# EAGLE board Temperature_sensor_Board2_Tiled (EAGLE 7.7.0)
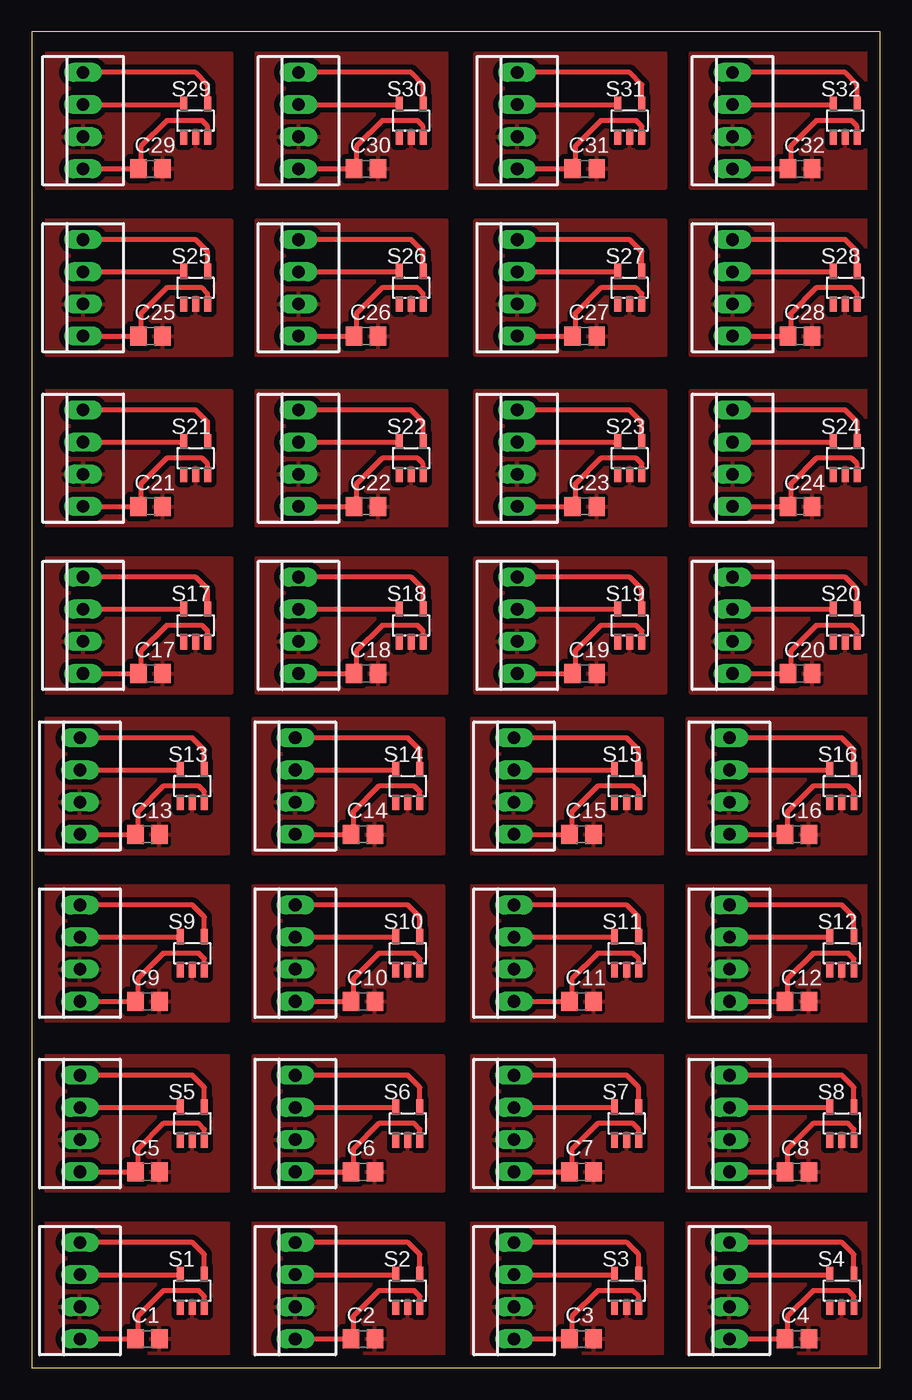
[diagram p0: board, top side]

Size 67.04 x 105.59 mm. Coordinates in mm from the lower left corner, seen from the top.
Outline: 0,0 67.04,0 67.04,105.59 0,105.59 0,0
Copper layers (1*16): Top 0.035mm / dielectric 1.5mm / Bottom 0.035mm
Design rules "default *": minimum track width 10mil, minimum drill 24mil, track to track 16mil, track to pad 14mil, pad to pad 14mil, via to via 14mil, smd to smd 14mil, copper to edge 40mil, drill to drill 8mil, minimum pad ring 10mil, minimum via ring 8mil, stop-mask expansion 4mil, vias tented up to drill 0mil, thermal gap 10mil

## Footprints (pad centres in the part's own frame; a part is rotated, then mirrored left to right if it is on the bottom)
C0805 = smd 1.3 x 1.5: 1 -0.95,0; 2 0.95,0
SOT23-5L = smd 0.55 x 1.2: 1 -0.95,-1.3; 2 0,-1.3; 3 0.95,-1.3; 4 0.95,1.3; 5 -0.95,1.3
22-23-2041 = drill 1 long: 1 -3.81,0; 2 -1.27,0; 3 1.27,0; 4 3.81,0

## Placement (x,y rotation side)
C1  0.01uF  [C0805]  9.14,2.29 0 top
C2  0.01uF  [C0805]  26.16,2.29 0 top
C3  0.01uF  [C0805]  43.43,2.29 0 top
C4  0.01uF  [C0805]  60.45,2.29 0 top
C5  0.01uF  [C0805]  9.14,15.49 0 top
C6  0.01uF  [C0805]  26.16,15.49 0 top
C7  0.01uF  [C0805]  43.43,15.49 0 top
C8  0.01uF  [C0805]  60.45,15.49 0 top
C9  0.01uF  [C0805]  9.14,28.96 0 top
C10  0.01uF  [C0805]  26.16,28.96 0 top
C11  0.01uF  [C0805]  43.43,28.96 0 top
C12  0.01uF  [C0805]  60.45,28.96 0 top
C13  0.01uF  [C0805]  9.14,42.16 0 top
C14  0.01uF  [C0805]  26.16,42.16 0 top
C15  0.01uF  [C0805]  43.43,42.16 0 top
C16  0.01uF  [C0805]  60.45,42.16 0 top
C17  0.01uF  [C0805]  9.4,54.86 0 top
C18  0.01uF  [C0805]  26.42,54.86 0 top
C19  0.01uF  [C0805]  43.69,54.86 0 top
C20  0.01uF  [C0805]  60.71,54.86 0 top
C21  0.01uF  [C0805]  9.4,68.07 0 top
C22  0.01uF  [C0805]  26.42,68.07 0 top
C23  0.01uF  [C0805]  43.69,68.07 0 top
C24  0.01uF  [C0805]  60.71,68.07 0 top
C25  0.01uF  [C0805]  9.4,81.53 0 top
C26  0.01uF  [C0805]  26.42,81.53 0 top
C27  0.01uF  [C0805]  43.69,81.53 0 top
C28  0.01uF  [C0805]  60.71,81.53 0 top
C29  0.01uF  [C0805]  9.4,94.74 0 top
C30  0.01uF  [C0805]  26.42,94.74 0 top
C31  0.01uF  [C0805]  43.69,94.74 0 top
C32  0.01uF  [C0805]  60.71,94.74 0 top
S1  TC74  [SOT23-5L]  12.7,6.1 0 top
S2  TC74  [SOT23-5L]  29.72,6.1 0 top
S3  TC74  [SOT23-5L]  46.99,6.1 0 top
S4  TC74  [SOT23-5L]  64.01,6.1 0 top
S5  TC74  [SOT23-5L]  12.7,19.3 0 top
S6  TC74  [SOT23-5L]  29.72,19.3 0 top
S7  TC74  [SOT23-5L]  46.99,19.3 0 top
S8  TC74  [SOT23-5L]  64.01,19.3 0 top
S9  TC74  [SOT23-5L]  12.7,32.77 0 top
S10  TC74  [SOT23-5L]  29.72,32.77 0 top
S11  TC74  [SOT23-5L]  46.99,32.77 0 top
S12  TC74  [SOT23-5L]  64.01,32.77 0 top
S13  TC74  [SOT23-5L]  12.7,45.97 0 top
S14  TC74  [SOT23-5L]  29.72,45.97 0 top
S15  TC74  [SOT23-5L]  46.99,45.97 0 top
S16  TC74  [SOT23-5L]  64.01,45.97 0 top
S17  TC74  [SOT23-5L]  12.95,58.67 0 top
S18  TC74  [SOT23-5L]  29.97,58.67 0 top
S19  TC74  [SOT23-5L]  47.24,58.67 0 top
S20  TC74  [SOT23-5L]  64.26,58.67 0 top
S21  TC74  [SOT23-5L]  12.95,71.88 0 top
S22  TC74  [SOT23-5L]  29.97,71.88 0 top
S23  TC74  [SOT23-5L]  47.24,71.88 0 top
S24  TC74  [SOT23-5L]  64.26,71.88 0 top
S25  TC74  [SOT23-5L]  12.95,85.34 0 top
S26  TC74  [SOT23-5L]  29.97,85.34 0 top
S27  TC74  [SOT23-5L]  47.24,85.34 0 top
S28  TC74  [SOT23-5L]  64.26,85.34 0 top
S29  TC74  [SOT23-5L]  12.95,98.55 0 top
S30  TC74  [SOT23-5L]  29.97,98.55 0 top
S31  TC74  [SOT23-5L]  47.24,98.55 0 top
S32  TC74  [SOT23-5L]  64.26,98.55 0 top
X1  22-23-2041  [22-23-2041]  3.81,6.1 90 top
X2  22-23-2041  [22-23-2041]  20.83,6.1 90 top
X3  22-23-2041  [22-23-2041]  38.1,6.1 90 top
X4  22-23-2041  [22-23-2041]  55.12,6.1 90 top
X5  22-23-2041  [22-23-2041]  3.81,19.3 90 top
X6  22-23-2041  [22-23-2041]  20.83,19.3 90 top
X7  22-23-2041  [22-23-2041]  38.1,19.3 90 top
X8  22-23-2041  [22-23-2041]  55.12,19.3 90 top
X9  22-23-2041  [22-23-2041]  3.81,32.77 90 top
X10  22-23-2041  [22-23-2041]  20.83,32.77 90 top
X11  22-23-2041  [22-23-2041]  38.1,32.77 90 top
X12  22-23-2041  [22-23-2041]  55.12,32.77 90 top
X13  22-23-2041  [22-23-2041]  3.81,45.97 90 top
X14  22-23-2041  [22-23-2041]  20.83,45.97 90 top
X15  22-23-2041  [22-23-2041]  38.1,45.97 90 top
X16  22-23-2041  [22-23-2041]  55.12,45.97 90 top
X17  22-23-2041  [22-23-2041]  4.06,58.67 90 top
X18  22-23-2041  [22-23-2041]  21.08,58.67 90 top
X19  22-23-2041  [22-23-2041]  38.35,58.67 90 top
X20  22-23-2041  [22-23-2041]  55.37,58.67 90 top
X21  22-23-2041  [22-23-2041]  4.06,71.88 90 top
X22  22-23-2041  [22-23-2041]  21.08,71.88 90 top
X23  22-23-2041  [22-23-2041]  38.35,71.88 90 top
X24  22-23-2041  [22-23-2041]  55.37,71.88 90 top
X25  22-23-2041  [22-23-2041]  4.06,85.34 90 top
X26  22-23-2041  [22-23-2041]  21.08,85.34 90 top
X27  22-23-2041  [22-23-2041]  38.35,85.34 90 top
X28  22-23-2041  [22-23-2041]  55.37,85.34 90 top
X29  22-23-2041  [22-23-2041]  4.06,98.55 90 top
X30  22-23-2041  [22-23-2041]  21.08,98.55 90 top
X31  22-23-2041  [22-23-2041]  38.35,98.55 90 top
X32  22-23-2041  [22-23-2041]  55.37,98.55 90 top

## Library data of the parts
C1-C32 = rcl
S1-S32 = Mine
X1-X32 = Mine; MF: MOLEX; MPN: 22-23-2041; OC_FARNELL: 1462920; OC_NEWARK: 38C0355

## Nets
GND: C1.2 S1.2 X1.2
GND1: C2.2 S2.2 X2.2
GND2: C3.2 S3.2 X3.2
GND3: C4.2 S4.2 X4.2
GND4: C5.2 S5.2 X5.2
GND5: C6.2 S6.2 X6.2
GND6: C7.2 S7.2 X7.2
GND7: C8.2 S8.2 X8.2
GND8: C9.2 S9.2 X9.2
GND9: C10.2 S10.2 X10.2
GND10: C11.2 S11.2 X11.2
GND11: C12.2 S12.2 X12.2
GND12: C13.2 S13.2 X13.2
GND13: C14.2 S14.2 X14.2
GND14: C15.2 S15.2 X15.2
GND15: C16.2 S16.2 X16.2
GND16: C17.2 S17.2 X17.2
GND17: C18.2 S18.2 X18.2
GND18: C19.2 S19.2 X19.2
GND19: C20.2 S20.2 X20.2
GND20: C21.2 S21.2 X21.2
GND21: C22.2 S22.2 X22.2
GND22: C23.2 S23.2 X23.2
GND23: C24.2 S24.2 X24.2
GND24: C25.2 S25.2 X25.2
GND25: C26.2 S26.2 X26.2
GND26: C27.2 S27.2 X27.2
GND27: C28.2 S28.2 X28.2
GND28: C29.2 S29.2 X29.2
GND29: C30.2 S30.2 X30.2
GND30: C31.2 S31.2 X31.2
GND31: C32.2 S32.2 X32.2
N$1: S2.5 X2.3
N$2: C1.1 S1.3 X1.1
N$3: S1.5 X1.3
N$4: S1.4 X1.4
N$5: S2.4 X2.4
N$6: C2.1 S2.3 X2.1
N$7: S3.5 X3.3
N$8: S3.4 X3.4
N$9: C3.1 S3.3 X3.1
N$10: S4.5 X4.3
N$11: S4.4 X4.4
N$12: C4.1 S4.3 X4.1
N$13: S5.5 X5.3
N$14: S5.4 X5.4
N$15: C5.1 S5.3 X5.1
N$16: S6.5 X6.3
N$17: S6.4 X6.4
N$18: C6.1 S6.3 X6.1
N$19: S7.5 X7.3
N$20: S7.4 X7.4
N$21: C7.1 S7.3 X7.1
N$22: S8.5 X8.3
N$23: S8.4 X8.4
N$24: C8.1 S8.3 X8.1
N$25: S9.5 X9.3
N$26: S9.4 X9.4
N$27: C9.1 S9.3 X9.1
N$28: S10.5 X10.3
N$29: S10.4 X10.4
N$30: C10.1 S10.3 X10.1
N$31: S11.5 X11.3
N$32: S11.4 X11.4
N$33: C11.1 S11.3 X11.1
N$34: S12.5 X12.3
N$35: S12.4 X12.4
N$36: C12.1 S12.3 X12.1
N$37: S13.5 X13.3
N$38: S13.4 X13.4
N$39: C13.1 S13.3 X13.1
N$40: S14.5 X14.3
N$41: S14.4 X14.4
N$42: C14.1 S14.3 X14.1
N$43: S15.5 X15.3
N$44: S15.4 X15.4
N$45: C15.1 S15.3 X15.1
N$46: S16.5 X16.3
N$47: S16.4 X16.4
N$48: C16.1 S16.3 X16.1
N$49: S17.5 X17.3
N$50: S17.4 X17.4
N$51: C17.1 S17.3 X17.1
N$52: S18.5 X18.3
N$53: S18.4 X18.4
N$54: C18.1 S18.3 X18.1
N$55: S19.5 X19.3
N$56: S19.4 X19.4
N$57: C19.1 S19.3 X19.1
N$58: S20.5 X20.3
N$59: S20.4 X20.4
N$60: C20.1 S20.3 X20.1
N$61: S21.5 X21.3
N$62: S21.4 X21.4
N$63: C21.1 S21.3 X21.1
N$64: S22.5 X22.3
N$65: S22.4 X22.4
N$66: C22.1 S22.3 X22.1
N$67: S23.5 X23.3
N$68: S23.4 X23.4
N$69: C23.1 S23.3 X23.1
N$70: S24.5 X24.3
N$71: S24.4 X24.4
N$72: C24.1 S24.3 X24.1
N$73: S25.5 X25.3
N$74: S25.4 X25.4
N$75: C25.1 S25.3 X25.1
N$76: S26.5 X26.3
N$77: S26.4 X26.4
N$78: C26.1 S26.3 X26.1
N$79: S27.5 X27.3
N$80: S27.4 X27.4
N$81: C27.1 S27.3 X27.1
N$82: S28.5 X28.3
N$83: S28.4 X28.4
N$84: C28.1 S28.3 X28.1
N$85: S29.5 X29.3
N$86: S29.4 X29.4
N$87: C29.1 S29.3 X29.1
N$88: S30.5 X30.3
N$89: S30.4 X30.4
N$90: C30.1 S30.3 X30.1
N$91: S31.5 X31.3
N$92: S31.4 X31.4
N$93: C31.1 S31.3 X31.1
N$94: S32.5 X32.3
N$95: S32.4 X32.4
N$96: C32.1 S32.3 X32.1

## Tracks (layer width: path | path; a pad name or v marks a point on that pad's centre or on a via)
GND
  pour Top: 0.51,11.43 15.49,11.43 15.49,0.76 0.51,0.76
GND1
  pour Top: 17.53,11.43 32.51,11.43 32.51,0.76 17.53,0.76
GND2
  pour Top: 34.8,11.43 49.78,11.43 49.78,0.76 34.8,0.76
GND3
  pour Top: 51.82,11.43 66.8,11.43 66.8,0.76 51.82,0.76
GND4
  pour Top: 0.51,24.64 15.49,24.64 15.49,13.97 0.51,13.97
GND5
  pour Top: 17.53,24.64 32.51,24.64 32.51,13.97 17.53,13.97
GND6
  pour Top: 34.8,24.64 49.78,24.64 49.78,13.97 34.8,13.97
GND7
  pour Top: 51.82,24.64 66.8,24.64 66.8,13.97 51.82,13.97
GND8
  pour Top: 0.51,38.1 15.49,38.1 15.49,27.43 0.51,27.43
GND9
  pour Top: 17.53,38.1 32.51,38.1 32.51,27.43 17.53,27.43
GND10
  pour Top: 34.8,38.1 49.78,38.1 49.78,27.43 34.8,27.43
GND11
  pour Top: 51.82,38.1 66.8,38.1 66.8,27.43 51.82,27.43
GND12
  pour Top: 0.51,51.31 15.49,51.31 15.49,40.64 0.51,40.64
GND13
  pour Top: 17.53,51.31 32.51,51.31 32.51,40.64 17.53,40.64
GND14
  pour Top: 34.8,51.31 49.78,51.31 49.78,40.64 34.8,40.64
GND15
  pour Top: 51.82,51.31 66.8,51.31 66.8,40.64 51.82,40.64
GND16
  pour Top: 0.76,64.01 15.75,64.01 15.75,53.34 0.76,53.34
GND17
  pour Top: 17.78,64.01 32.77,64.01 32.77,53.34 17.78,53.34
GND18
  pour Top: 35.05,64.01 50.04,64.01 50.04,53.34 35.05,53.34
GND19
  pour Top: 52.07,64.01 67.06,64.01 67.06,53.34 52.07,53.34
GND20
  pour Top: 0.76,77.22 15.75,77.22 15.75,66.55 0.76,66.55
GND21
  pour Top: 17.78,77.22 32.77,77.22 32.77,66.55 17.78,66.55
GND22
  pour Top: 35.05,77.22 50.04,77.22 50.04,66.55 35.05,66.55
GND23
  pour Top: 52.07,77.22 67.06,77.22 67.06,66.55 52.07,66.55
GND24
  pour Top: 0.76,90.68 15.75,90.68 15.75,80.01 0.76,80.01
GND25
  pour Top: 17.78,90.68 32.77,90.68 32.77,80.01 17.78,80.01
GND26
  pour Top: 35.05,90.68 50.04,90.68 50.04,80.01 35.05,80.01
GND27
  pour Top: 52.07,90.68 67.06,90.68 67.06,80.01 52.07,80.01
GND28
  pour Top: 0.76,103.89 15.75,103.89 15.75,93.22 0.76,93.22
GND29
  pour Top: 17.78,103.89 32.77,103.89 32.77,93.22 17.78,93.22
GND30
  pour Top: 35.05,103.89 50.04,103.89 50.04,93.22 35.05,93.22
GND31
  pour Top: 52.07,103.89 67.06,103.89 67.06,93.22 52.07,93.22
N$1
  Top 0.406: X2.3 28.74,7.37 S2.5
N$2
  Top 0.406: X1.1 C1.1 8.38,2.47 8.38,4.06 10.41,6.1 13.21,6.1 13.65,5.65 S1.3
N$3
  Top 0.406: X1.3 11.72,7.37 S1.5
N$4
  Top 0.406: S1.4 13.65,8.96 12.7,9.91 X1.4
N$5
  Top 0.406: S2.4 30.67,8.96 29.72,9.91 X2.4
N$6
  Top 0.406: X2.1 C2.1 25.4,2.47 25.4,4.06 27.43,6.1 30.23,6.1 30.67,5.65 S2.3
N$7
  Top 0.406: X3.3 46.01,7.37 S3.5
N$8
  Top 0.406: S3.4 47.94,8.96 46.99,9.91 X3.4
N$9
  Top 0.406: X3.1 C3.1 42.67,2.47 42.67,4.06 44.7,6.1 47.5,6.1 47.94,5.65 S3.3
N$10
  Top 0.406: X4.3 63.03,7.37 S4.5
N$11
  Top 0.406: S4.4 64.96,8.96 64.01,9.91 X4.4
N$12
  Top 0.406: X4.1 C4.1 59.69,2.47 59.69,4.06 61.72,6.1 64.52,6.1 64.96,5.65 S4.3
N$13
  Top 0.406: X5.3 11.72,20.57 S5.5
N$14
  Top 0.406: S5.4 13.65,22.16 12.7,23.11 X5.4
N$15
  Top 0.406: X5.1 C5.1 8.38,15.68 8.38,17.27 10.41,19.3 13.21,19.3 13.65,18.86 S5.3
N$16
  Top 0.406: X6.3 28.74,20.57 S6.5
N$17
  Top 0.406: S6.4 30.67,22.16 29.72,23.11 X6.4
N$18
  Top 0.406: X6.1 C6.1 25.4,15.68 25.4,17.27 27.43,19.3 30.23,19.3 30.67,18.86 S6.3
N$19
  Top 0.406: X7.3 46.01,20.57 S7.5
N$20
  Top 0.406: S7.4 47.94,22.16 46.99,23.11 X7.4
N$21
  Top 0.406: X7.1 C7.1 42.67,15.68 42.67,17.27 44.7,19.3 47.5,19.3 47.94,18.86 S7.3
N$22
  Top 0.406: X8.3 63.03,20.57 S8.5
N$23
  Top 0.406: S8.4 64.96,22.16 64.01,23.11 X8.4
N$24
  Top 0.406: X8.1 C8.1 59.69,15.68 59.69,17.27 61.72,19.3 64.52,19.3 64.96,18.86 S8.3
N$25
  Top 0.406: X9.3 11.72,34.04 S9.5
N$26
  Top 0.406: S9.4 13.65,35.63 12.7,36.58 X9.4
N$27
  Top 0.406: X9.1 C9.1 8.38,29.14 8.38,30.73 10.41,32.77 13.21,32.77 13.65,32.32 S9.3
N$28
  Top 0.406: X10.3 28.74,34.04 S10.5
N$29
  Top 0.406: S10.4 30.67,35.63 29.72,36.58 X10.4
N$30
  Top 0.406: X10.1 C10.1 25.4,29.14 25.4,30.73 27.43,32.77 30.23,32.77 30.67,32.32 S10.3
N$31
  Top 0.406: X11.3 46.01,34.04 S11.5
N$32
  Top 0.406: S11.4 47.94,35.63 46.99,36.58 X11.4
N$33
  Top 0.406: X11.1 C11.1 42.67,29.14 42.67,30.73 44.7,32.77 47.5,32.77 47.94,32.32 S11.3
N$34
  Top 0.406: X12.3 63.03,34.04 S12.5
N$35
  Top 0.406: S12.4 64.96,35.63 64.01,36.58 X12.4
N$36
  Top 0.406: X12.1 C12.1 59.69,29.14 59.69,30.73 61.72,32.77 64.52,32.77 64.96,32.32 S12.3
N$37
  Top 0.406: X13.3 11.72,47.24 S13.5
N$38
  Top 0.406: S13.4 13.65,48.83 12.7,49.78 X13.4
N$39
  Top 0.406: X13.1 C13.1 8.38,42.35 8.38,43.94 10.41,45.97 13.21,45.97 13.65,45.53 S13.3
N$40
  Top 0.406: X14.3 28.74,47.24 S14.5
N$41
  Top 0.406: S14.4 30.67,48.83 29.72,49.78 X14.4
N$42
  Top 0.406: X14.1 C14.1 25.4,42.35 25.4,43.94 27.43,45.97 30.23,45.97 30.67,45.53 S14.3
N$43
  Top 0.406: X15.3 46.01,47.24 S15.5
N$44
  Top 0.406: S15.4 47.94,48.83 46.99,49.78 X15.4
N$45
  Top 0.406: X15.1 C15.1 42.67,42.35 42.67,43.94 44.7,45.97 47.5,45.97 47.94,45.53 S15.3
N$46
  Top 0.406: X16.3 63.03,47.24 S16.5
N$47
  Top 0.406: S16.4 64.96,48.83 64.01,49.78 X16.4
N$48
  Top 0.406: X16.1 C16.1 59.69,42.35 59.69,43.94 61.72,45.97 64.52,45.97 64.96,45.53 S16.3
N$49
  Top 0.406: X17.3 11.97,59.94 S17.5
N$50
  Top 0.406: S17.4 13.9,61.53 12.95,62.48 X17.4
N$51
  Top 0.406: X17.1 C17.1 8.64,55.05 8.64,56.64 10.67,58.67 13.46,58.67 13.9,58.23 S17.3
N$52
  Top 0.406: X18.3 28.99,59.94 S18.5
N$53
  Top 0.406: S18.4 30.92,61.53 29.97,62.48 X18.4
N$54
  Top 0.406: X18.1 C18.1 25.65,55.05 25.65,56.64 27.69,58.67 30.48,58.67 30.92,58.23 S18.3
N$55
  Top 0.406: X19.3 46.26,59.94 S19.5
N$56
  Top 0.406: S19.4 48.19,61.53 47.24,62.48 X19.4
N$57
  Top 0.406: X19.1 C19.1 42.93,55.05 42.93,56.64 44.96,58.67 47.75,58.67 48.19,58.23 S19.3
N$58
  Top 0.406: X20.3 63.28,59.94 S20.5
N$59
  Top 0.406: S20.4 65.21,61.53 64.26,62.48 X20.4
N$60
  Top 0.406: X20.1 C20.1 59.94,55.05 59.94,56.64 61.98,58.67 64.77,58.67 65.21,58.23 S20.3
N$61
  Top 0.406: X21.3 11.97,73.15 S21.5
N$62
  Top 0.406: S21.4 13.9,74.74 12.95,75.69 X21.4
N$63
  Top 0.406: X21.1 C21.1 8.64,68.26 8.64,69.85 10.67,71.88 13.46,71.88 13.9,71.44 S21.3
N$64
  Top 0.406: X22.3 28.99,73.15 S22.5
N$65
  Top 0.406: S22.4 30.92,74.74 29.97,75.69 X22.4
N$66
  Top 0.406: X22.1 C22.1 25.65,68.26 25.65,69.85 27.69,71.88 30.48,71.88 30.92,71.44 S22.3
N$67
  Top 0.406: X23.3 46.26,73.15 S23.5
N$68
  Top 0.406: S23.4 48.19,74.74 47.24,75.69 X23.4
N$69
  Top 0.406: X23.1 C23.1 42.93,68.26 42.93,69.85 44.96,71.88 47.75,71.88 48.19,71.44 S23.3
N$70
  Top 0.406: X24.3 63.28,73.15 S24.5
N$71
  Top 0.406: S24.4 65.21,74.74 64.26,75.69 X24.4
N$72
  Top 0.406: X24.1 C24.1 59.94,68.26 59.94,69.85 61.98,71.88 64.77,71.88 65.21,71.44 S24.3
N$73
  Top 0.406: X25.3 11.97,86.61 S25.5
N$74
  Top 0.406: S25.4 13.9,88.2 12.95,89.15 X25.4
N$75
  Top 0.406: X25.1 C25.1 8.64,81.72 8.64,83.31 10.67,85.34 13.46,85.34 13.9,84.9 S25.3
N$76
  Top 0.406: X26.3 28.99,86.61 S26.5
N$77
  Top 0.406: S26.4 30.92,88.2 29.97,89.15 X26.4
N$78
  Top 0.406: X26.1 C26.1 25.65,81.72 25.65,83.31 27.69,85.34 30.48,85.34 30.92,84.9 S26.3
N$79
  Top 0.406: X27.3 46.26,86.61 S27.5
N$80
  Top 0.406: S27.4 48.19,88.2 47.24,89.15 X27.4
N$81
  Top 0.406: X27.1 C27.1 42.93,81.72 42.93,83.31 44.96,85.34 47.75,85.34 48.19,84.9 S27.3
N$82
  Top 0.406: X28.3 63.28,86.61 S28.5
N$83
  Top 0.406: S28.4 65.21,88.2 64.26,89.15 X28.4
N$84
  Top 0.406: X28.1 C28.1 59.94,81.72 59.94,83.31 61.98,85.34 64.77,85.34 65.21,84.9 S28.3
N$85
  Top 0.406: X29.3 11.97,99.82 S29.5
N$86
  Top 0.406: S29.4 13.9,101.41 12.95,102.36 X29.4
N$87
  Top 0.406: X29.1 C29.1 8.64,94.93 8.64,96.52 10.67,98.55 13.46,98.55 13.9,98.11 S29.3
N$88
  Top 0.406: X30.3 28.99,99.82 S30.5
N$89
  Top 0.406: S30.4 30.92,101.41 29.97,102.36 X30.4
N$90
  Top 0.406: X30.1 C30.1 25.65,94.93 25.65,96.52 27.69,98.55 30.48,98.55 30.92,98.11 S30.3
N$91
  Top 0.406: X31.3 46.26,99.82 S31.5
N$92
  Top 0.406: S31.4 48.19,101.41 47.24,102.36 X31.4
N$93
  Top 0.406: X31.1 C31.1 42.93,94.93 42.93,96.52 44.96,98.55 47.75,98.55 48.19,98.11 S31.3
N$94
  Top 0.406: X32.3 63.28,99.82 S32.5
N$95
  Top 0.406: S32.4 65.21,101.41 64.26,102.36 X32.4
N$96
  Top 0.406: X32.1 C32.1 59.94,94.93 59.94,96.52 61.98,98.55 64.77,98.55 65.21,98.11 S32.3